# Altium PCB BOARD.PcbDoc
Units mm, origin at the board's own origin, x right, y up, seen from the top; angles counter-clockwise.
Board outline 55 x 55 mm, 2 copper layers (Top Layer, Bottom Layer); 45 components, 73 nets, 188 pads, 24 vias.
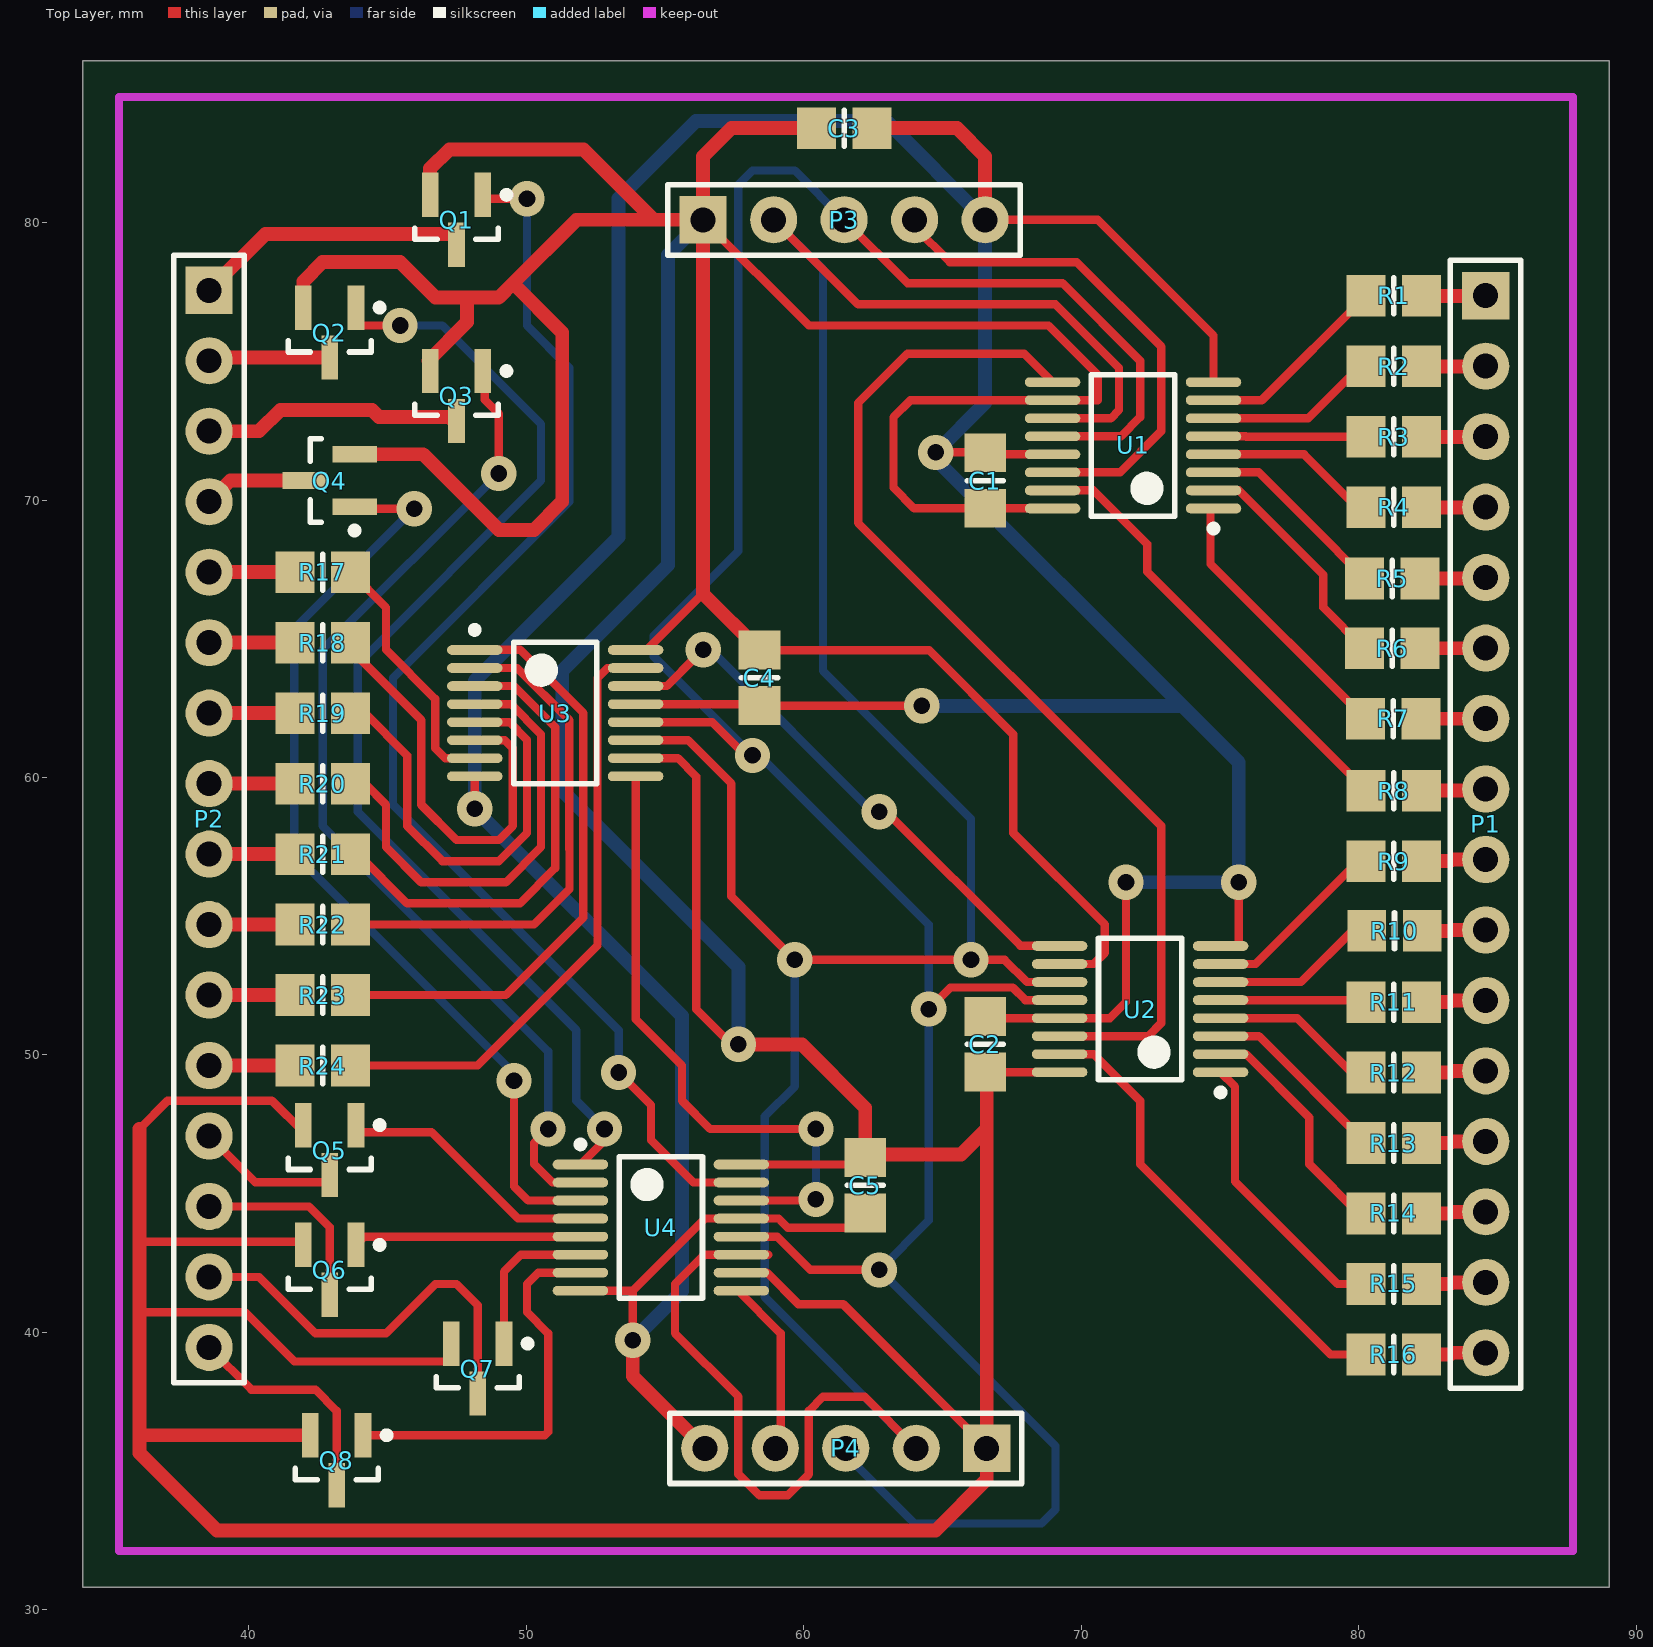
[diagram p0: Top Layer view]
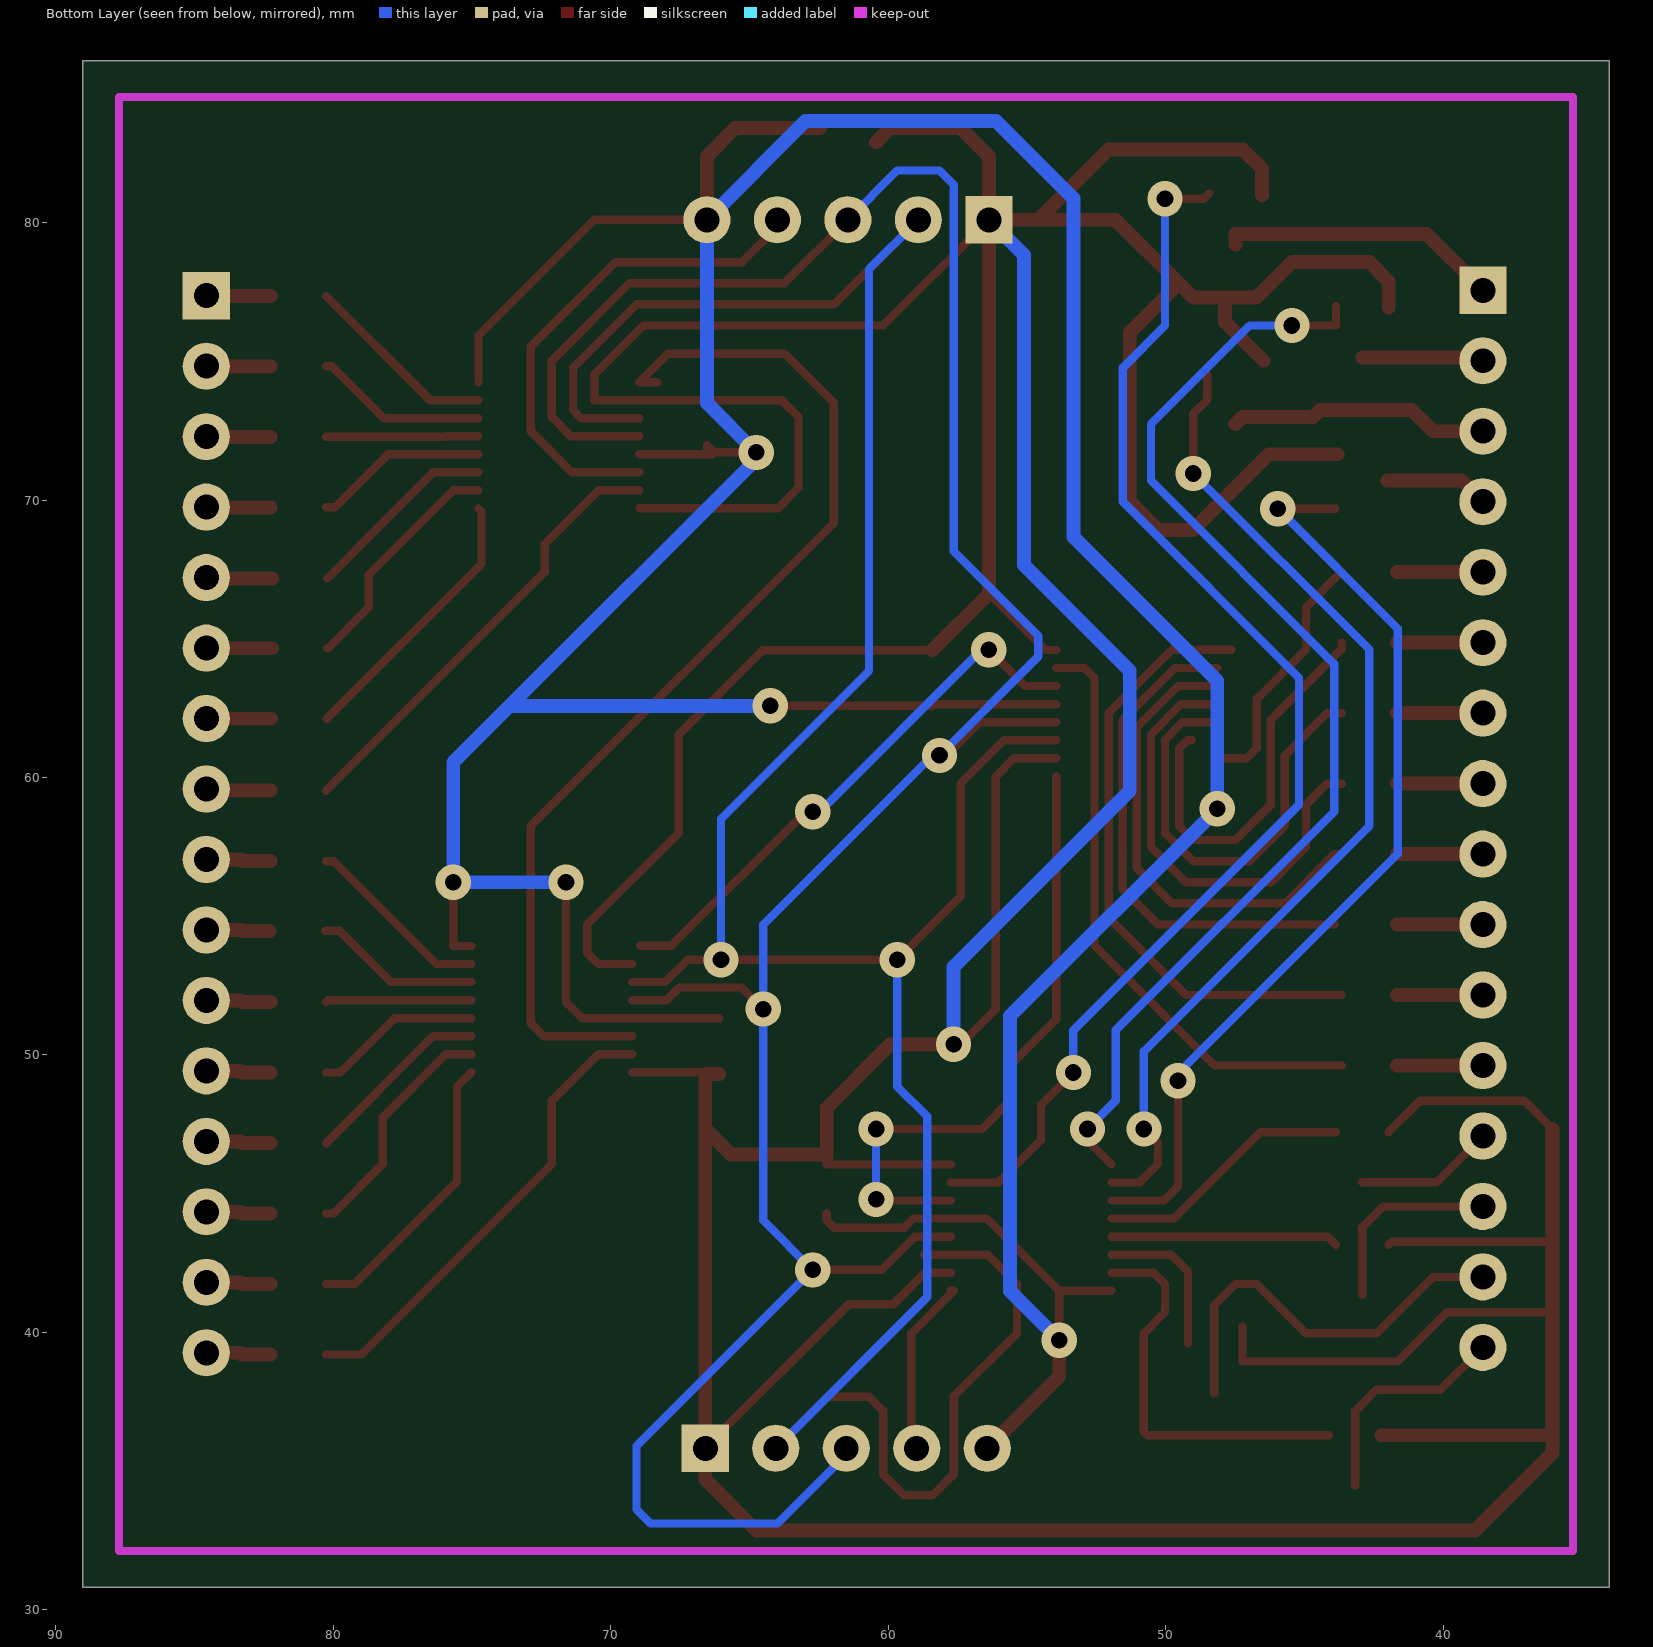
[diagram p1: Bottom Layer view, seen from below]

## Layer stack, top to bottom
Top Solder: solder mask 0.0102, Solder Resist, Dk 3.5
Top Layer: signal copper 0.0356
Dielectric 1: dielectric 0.32, FR-4, Dk 4.8
Bottom Layer: signal copper 0.0356
Bottom Solder: solder mask 0.0102, Solder Resist, Dk 3.5

## Board outline
34.025,30.825 89.025,30.825 89.025,85.825 34.025,85.825

## Design rules (kind name [scope] priority, off if disabled: settings)
Clearance [All] p1: gap=0.2
HoleSize [All] p1 off: absolutevalues=TRUE maxlimit=2.54 minlimit=0.025 maxpercent=80.000 minpercent=20.000
HoleToHoleClearance [All] p1 off: gap=0.254 allowstackedmicrovias=TRUE
LayerPairs [All] p1 off: enforce=TRUE
MinimumSolderMaskSliver [All] p1 off: minsoldermaskwidth=0.254
NetAntennae [All] p1 off: netantennaetolerance=0
PolygonConnect [All] p1: connectstyle=Relief reliefconductorwidth=0.254 reliefentries=4 polygonreliefangle="90 Angle" airgapwidth=0.254
RoutingVias [All] p1: holewidth=0.6 width=1.27 viastyle="Through Hole" minholewidth=0.6 minwidth=1.27 maxholewidth=0.6 maxwidth=1.27
SilkToBoardRegionClearance [All] p1 off:
SilkToSilkClearance [All] p1 off: silktosilkclearance=0.254
SilkToSolderMaskClearance [IsPad] p1 off: minsilkscreentomaskgap=0.254 clearancetoexposedcopper=TRUE
SolderMaskExpansion [All] p1: expansion=0.102
Width [All] p1: maxlimit=2 minlimit=0.2 preferedwidth=0.3
21 further rules are at their usual default settings.

## Components (designator, comment, footprint, x,y, rotation, side; value= is the part's Value field where it differs from the comment)
C1 "Cap" 6-0805_M 66.537,70.703 r270 top
C2 "Cap" 6-0805_M 66.537,50.383 r270 top
C3 "Cap" 6-0805_M 61.457,83.403 r180 top
C4 "Cap" 6-0805_M 58.409,63.591 r90 top
C5 "Cap" 6-0805_M 62.219,45.303 r90 top
P1 "Header 16" HDR1X16 84.58,77.366 r270 top
P2 "Header 16" HDR1X16 38.571,77.561 r270 top
P3 "Heade_ 5_IN" HDR1X5 56.377,80.101 r0 top
P4 "Heade_ 5_OUT" HDR1X5 66.596,35.825 r180 top
Q1 "IRLML6402" SOT95P237X112-3N 47.487,80.101 r270 top
Q2 "IRLML6402" SOT95P237X112-3N 42.915,76.037 r270 top
Q3 "IRLML6402" SOT95P237X112-3N 47.487,73.751 r270 top
Q4 "IRLML6402" SOT95P237X112-3N 42.915,70.703 r180 top
Q5 "IRLML6402" SOT95P237X112-3N 42.915,46.573 r270 top
Q6 "IRLML6402" SOT95P237X112-3N 42.915,42.255 r270 top
Q7 "IRLML6402" SOT95P237X112-3N 48.249,38.699 r270 top
Q8 "IRLML6402" SOT95P237X112-3N 43.169,35.397 r270 top
R1 "Res2" 6-0805_M 81.269,77.358 r0 top
R2 "Res2" 6-0805_M 81.269,74.818 r0 top
R3 "Res2" 6-0805_M 81.269,72.278 r0 top
R4 "Res2" 6-0805_M 81.269,69.738 r0 top
R5 "Res2" 6-0805_M 81.218,67.172 r0 top
R6 "Res2" 6-0805_M 81.218,64.658 r0 top
R7 "Res2" 6-0805_M 81.244,62.118 r0 top
R8 "Res2" 6-0805_M 81.269,59.527 r0 top
R9 "Res2" 6-0805_M 81.269,56.987 r0 top
R10 "Res2" 6-0805_M 81.294,54.472 r0 top
R11 "Res2" 6-0805_M 81.269,51.907 r0 top
R12 "Res2" 6-0805_M 81.269,49.367 r0 top
R13 "Res2" 6-0805_M 81.269,46.827 r0 top
R14 "Res2" 6-0805_M 81.269,44.287 r0 top
R15 "Res2" 6-0805_M 81.269,41.747 r0 top
R16 "Res2" 6-0805_M 81.269,39.207 r0 top
R17 "Res2" 6-0805_M 42.661,67.401 r180 top
R18 "Res2" 6-0805_M 42.661,64.861 r180 top
R19 "Res2" 6-0805_M 42.661,62.321 r180 top
R20 "Res2" 6-0805_M 42.661,59.781 r180 top
R21 "Res2" 6-0805_M 42.661,57.241 r180 top
R22 "Res2" 6-0805_M 42.661,54.701 r180 top
R23 "Res2" 6-0805_M 42.661,52.161 r180 top
R24 "Res2" 6-0805_M 42.661,49.621 r180 top
U1 "74HC595" TSOP65P640X110-16M 71.871,71.973 r180 top
U2 "74HC595" TSOP65P640X110-16M 72.125,51.653 r180 top
U3 "74HC595" TSOP65P640X110-16M 51.043,62.321 r0 top
U4 "74HC595" TSOP65P640X110-16M 54.853,43.779 r0 top

## Footprints (in the part's own frame and the unit in brackets; to place one, negate y for a bottom-side part, rotate by r counter-clockwise, add the part's x,y. Pads: shape width x height; smd on the part's side, far side on the other; paste and mask are expansions set on the pad)
6-0805_M [mm] "Chip Resistor, Body 2.0x1.2mm, IPC Low Density"
  rect 1.4x1.5 smd: 1(-1,0) 2(1,0)
  silkscreen extent 0,-0.65 0,0.65, body extent -1.07,-0.7 1.07,0.7, height 0.7
HDR1X5 [mm] "Connector; Header; 5 Position"
  rect 1.7x1.7 hole 0.9: 1(0,0)
  round 1.7 hole 0.9: 2(2.54,0) 3(5.08,0) 4(7.62,0) 5(10.16,0)
  silkscreen extent -1.27,-1.27 11.43,1.27
HDR1X16 [mm] "Connector; Header; 16 Position"
  rect 1.7x1.7 hole 0.9: 1(0,0)
  round 1.7 hole 0.9: 2(2.54,0) 3(5.08,0) 4(7.62,0) 5(10.16,0) 6(12.7,0) 7(15.24,0) 8(17.78,0) 9(20.32,0) 10(22.86,0) 11(25.4,0) 12(27.94,0) 13(30.48,0) 14(33.02,0) 15(35.56,0) 16(38.1,0)
  silkscreen extent -1.27,-1.27 39.37,1.27
SOT95P237X112-3N [mm] "SOT23, 3-Leads, Body 2.92x2.37mm, Pitch 0.95mm, IPC Medium Density"
  rect 1.6x0.6 smd: 1(-0.9,0.95) 2(0.9,0) 3(-0.9,-0.95)
  silkscreen extent -1.02,-1.5 0.7,1.93, body extent -0.7,-1.52 0.7,1.52, height 1.12
TSOP65P640X110-16M [mm] "TSOP, 16-Leads, Body 5.00x4.40mm, Pitch 0.65mm, IPC Low Density"
  oval 2x0.35 smd: 1(-2.9,2.275) 2(-2.9,1.625) 3(-2.9,0.975) 4(-2.9,0.325) 5(-2.9,-0.325) 6(-2.9,-0.975) 7(-2.9,-1.625) 8(-2.9,-2.275) 9(2.9,-2.275) 10(2.9,-1.625) 11(2.9,-0.975) 12(2.9,-0.325) 13(2.9,0.325) 14(2.9,0.975) 15(2.9,1.625) 16(2.9,2.275)
  silkscreen extent -3.03,-2.55 1.5,3.12, body extent -2.25,-2.55 2.25,2.55, height 1.1

## Part data
C1 C2 C3 C4 C5: "Capacitor"
P1 P2: "Header, 16-Pin"
P3 P4: library part "Header 5", "Header, 5-Pin"
R1 R2 R3 R4 R5 R6 R7 R8 R9 R10 R11 R12 R13 R14 R15 R16 R17 R18 R19 R20 R21 R22 R23 R24: "Resistor"
U1 U2 U3 U4: "NXP"

## Via types
v1: diameter 1.27, hole 0.6, Top Layer to Bottom Layer, 24 vias

## Nets (pads, with @x,y where several pads share a name; then routed paths per layer and width w, separated by ;. In a path a pad name is that pad's centre, name@x,y a point inside that pad or via, vN(x,y) a via of type N, cw(c..) or ccw(c..) an arc to the next point about the centre after c; other vN are vias at no path point)
A1: P2.1 Q1.2 | length 10.3
  Top Layer w0.5: P2.1@38.943,77.653 38.663,77.653 40.603,79.593 47.487,79.593 Q1.2
A2: P2.2 Q2.2 | length 4.7
  Top Layer w0.5: P2.2 38.851,75.021 P2.2@38.967,75.137 ; P2.2@38.687,75.137 P2.2@38.967,75.137 ; Q2.2 P2.2@38.967,75.137
A3: P2.3 Q3.2 | length 9.4
  Top Layer w0.5: P2.3 40.375,72.481 41.137,73.243 44.439,73.243 44.693,72.989 47.233,72.989 Q3.2@47.487,72.735
A4: P2.4 Q4.2 | length 3.8
  Top Layer w0.5: P2.4 39.333,70.703 Q4.2
A5: P2.13 Q5.2 | length 5
  Top Layer w0.3: P2.13 40.233,45.419 Q5.2@42.915,45.419
A6: P2.14 Q6.2 | length 7.1
  Top Layer w0.3: P2.14 42.174,44.541 42.915,43.8 Q6.2
A7: P2.15 Q7.2 | length 14.8
  Top Layer w0.3: P2.15 40.375,42.001 42.407,39.969 44.947,39.969 46.725,41.747 47.487,41.747 48.249,40.985 Q7.2
A8: P2.16 Q8.2 | length 8.2
  Top Layer w0.3: P2.16 40.095,37.937 42.407,37.937 43.169,37.175 Q8.2
BL1: P1.8 R8.2 | length 2.3
  Top Layer w0.5: R8.2 84.521,59.527 P1.8
BL2: P1.7 R7.2 | length 2.3
  Top Layer w0.5: R7.2 84.572,62.118 P1.7
BL3: P1.6 R6.2 | length 2.4
  Top Layer w0.5: R6.2 84.572,64.658 P1.6
BL4: P1.5 R5.2 | length 2.4
  Top Layer w0.5: R5.2 84.546,67.172 P1.5
BL5: P1.4 R4.2 | length 2.3
  Top Layer w0.5: R4.2 84.572,69.738 P1.4
BL6: P1.3 R3.2 | length 2.3
  Top Layer w0.5: R3.2 84.572,72.278 P1.3
BL7: P1.2 R2.2 | length 2.3
  Top Layer w0.5: R2.2 84.572,74.818 P1.2
BL8: P1.1 R1.2 | length 2.3
  Top Layer w0.5: R1.2 84.572,77.358 P1.1
G1: Q8.1 U4.7 | length 14.5
  Top Layer w0.3: Q8.1 50.673,36.297 50.789,36.413 50.789,39.969 50.027,40.731 50.027,41.747 50.434,42.154 U4.7
G2: Q7.1 U4.6 | length 5.6
  Top Layer w0.3: Q7.1 49.199,42.189 49.814,42.804 U4.6
G3: Q6.1 U4.5 | length 8.2
  Top Layer w0.3: Q6.1 44.164,43.454 U4.5
G4: Q5.1 U4.4 | length 9.4
  Top Layer w0.3: Q5.1@43.865,47.219 46.587,47.219 49.702,44.104 U4.4
G5: Q4.1 U4.3 | length 34.2
  Top Layer w0.3: Q4.1@43.881,69.687 v1(45.963,69.687) ; v1(49.56,49.072) 49.56,45.262 50.068,44.754 U4.3
  Bottom Layer w0.3: v1(45.963,69.687) 41.645,65.369 41.645,57.241 49.56,49.326 v1(49.56,49.072)
G6: Q3.1 U4.2 | length 36.8
  Top Layer w0.3: Q3.1@48.503,74.513 48.503,73.619 49.011,73.111 v1(49.011,70.957) ; v1(50.789,47.335) 50.281,46.827 50.281,46.065 50.942,45.404 U4.2
  Bottom Layer w0.3: v1(49.011,70.957) 42.661,64.607 42.661,58.257 50.789,50.129 v1(50.789,47.335)
G7: Q2.1 U4.1 | length 42.3
  Top Layer w0.3: Q2.1@43.865,76.987 43.865,76.291 v1(45.455,76.291) ; U4.1 52.821,46.922 v1(52.821,47.335)
  Bottom Layer w0.3: v1(45.455,76.291) 46.979,76.291 50.535,72.735 50.535,70.703 43.931,64.099 43.931,58.765 51.805,50.891 51.805,48.351 v1(52.821,47.335)
G8: Q1.1 U4.15 | length 46.6
  Top Layer w0.3: Q1.1@48.437,81.051 48.625,80.863 v1(50.027,80.863) ; v1(53.329,49.367) 54.498,48.198 54.498,46.928 56.022,45.404 U4.15
  Bottom Layer w0.3: v1(50.027,80.863) 50.027,76.291 51.551,74.767 51.551,69.941 45.201,63.591 45.201,59.019 53.329,50.891 v1(53.329,49.367)
GND: C1.1 C2.1 C3.1 C4.1 C5.1 P3.5 P4.5 U1.8 U1.13 U2.8 U2.13 U3.8 U3.13 U4.8 U4.13 | length 171.3
  Top Layer w0.3: v1(48.143,58.871) U3.8 ; U4.8 53.837,41.504 ; v1@53.742,39.715 v1(53.837,39.715) 53.837,41.504 ; U3.13 C4.1@58.354,62.646 ; C4.1 64.235,62.591 v1@64.251,62.575 ; 59.1,44.104 U4.13 56.448,44.104 53.848,41.504 53.837,41.504 ; 59.171,44.033 59.425,43.779 61.965,43.779 62.219,44.033 C5.1 ; v1(64.759,71.719) 66.283,71.719 66.537,71.973 C1.1 ; C2.1@66.084,51.328 U2.13 71.038,51.328 71.617,51.907 v1@71.617,55.971 ; C1.1@66.338,71.648 U1.13 ; P3.5 70.601,80.101 74.771,75.931 U1.8 ; U2.8 75.67,53.928 75.681,53.939 v1(75.681,56.225)
  Top Layer w0.5: v1@54.091,39.461 53.837,39.207 53.837,38.424 P4.5 ; C3.1 65.521,83.403 66.537,82.387 P3.5
  Bottom Layer w0.5: v1(53.837,39.715) 55.615,41.493 55.615,51.399 v1(48.143,58.871) 48.143,63.485 53.329,68.671 53.329,80.863 56.123,83.657 62.981,83.657 P3.5 ; v1@64.251,62.575 73.649,62.575 ; P3.5@66.537,79.847 66.537,73.497 v1(64.759,71.719) 64.759,71.465 73.649,62.575 ; v1@71.617,55.971 71.871,56.225 v1(75.681,56.225) 75.681,60.543 73.649,62.575
  other v1: 71.617,56.225 64.251,62.591
GR1: P2.12 R24.2 | length 3.1
  Top Layer w0.5: P2.12 R24.2
GR2: P2.11 R23.2 | length 3.1
  Top Layer w0.5: P2.11 R23.2
GR3: P2.10 R22.2 | length 3.1
  Top Layer w0.5: P2.10 R22.2
GR4: P2.9 R21.2 | length 3.1
  Top Layer w0.5: P2.9 R21.2
GR5: P2.8 R20.2 | length 3.1
  Top Layer w0.5: P2.8 R20.2
GR6: P2.7 R19.2 | length 3.1
  Top Layer w0.5: P2.7 R19.2
GR7: P2.6 R18.2 | length 3.1
  Top Layer w0.5: P2.6 R18.2
GR8: P2.5 R17.2 | length 3.1
  Top Layer w0.5: P2.5 R17.2
LT: P3.3 P4.3 U1.12 U2.12 U3.12 U4.12 | length 104.5
  Top Layer w0.3: U3.12 56.702,61.996 v1@58.155,60.543 ; U4.12 59.043,43.454 60.242,42.255 v1(62.727,42.255) ; v1(58.155,60.797) v1@58.155,61.051 ; P3.3 63.743,77.815 69.331,77.815 72.125,75.021 72.125,72.989 71.434,72.298 U1.12 ; v1(64.505,51.653) 65.285,52.433 67.535,52.433 67.99,51.978 U2.12
  Bottom Layer w0.3: P4.3@61.203,35.512 61.596,35.512 63.997,33.111 68.569,33.111 69.077,33.619 69.077,35.905 v1(62.727,42.255) 64.505,44.033 v1(64.505,51.653) 64.505,54.701 58.409,60.797 v1(58.155,60.797) 54.599,64.353 54.599,65.115 57.647,68.163 57.647,81.371 58.155,81.879 59.679,81.879 P3.3
MOSI: P3.4 U1.14 | length 18.5
  Top Layer w0.3: P3.4 63.997,79.847 65.267,78.577 69.839,78.577 72.887,75.529 72.887,72.481 71.404,70.998 U1.14
NetR1_1: R1.1 U1.7 | length 7.1
  Top Layer w0.3: U1.7 76.509,73.598 R1.1
NetR2_1: R2.1 U1.6 | length 6.3
  Top Layer w0.3: U1.6 78.18,72.948 80.05,74.818 R2.1
NetR3_1: R3.1 U1.5 | length 5.5
  Top Layer w0.3: U1.5 75.935,72.298 75.955,72.278 R3.1
NetR4_1: R4.1 U1.4 | length 6.3
  Top Layer w0.3: U1.4 78.038,71.648 79.948,69.738 R4.1
NetR5_1: R5.1 U1.3 | length 7
  Top Layer w0.3: U1.3 76.402,70.998 79.237,68.163 79.237,68.154 R5.1
NetR6_1: R6.1 U1.2 | length 8.5
  Top Layer w0.3: U1.2 75.688,70.348 78.729,67.307 78.729,66.131 80.202,64.658 R6.1
NetR7_1: R7.1 U1.1 | length 9.9
  Top Layer w0.3: U1.1 74.665,69.592 74.665,67.696 R7.1
NetR8_1: R8.1 U1.15 | length 16.4
  Top Layer w0.3: U1.15 70.448,70.348 72.379,68.417 72.379,67.417 R8.1
NetR9_1: R9.1 U2.7 | length 6.8
  Top Layer w0.3: U2.7 76.29,53.278 79.999,56.987 R9.1
NetR10_1: R10.1 U2.6 | length 6
  Top Layer w0.3: U2.6 77.926,52.628 79.77,54.472 R10.1
NetR11_1: R11.1 U2.5 | length 5.3
  Top Layer w0.3: U2.5 80.182,51.978 80.253,51.907 R11.1
NetR12_1: R12.1 U2.4 | length 6.1
  Top Layer w0.3: U2.4 77.784,51.328 79.745,49.367 R12.1
NetR13_1: R13.1 U2.3 | length 6.8
  Top Layer w0.3: U2.3 76.402,50.678 80.261,46.819 R13.1
NetR14_1: R14.1 U2.2 | length 8.6
  Top Layer w0.3: U2.2 75.942,50.028 78.221,47.749 78.221,46.065 79.999,44.287 R14.1
NetR15_1: R15.1 U2.1 | length 10.4
  Top Layer w0.3: U2.1 75.544,48.859 75.544,45.44 79.237,41.747 R15.1
NetR16_1: R16.1 U2.15 | length 16.9
  Top Layer w0.3: U2.15 70.448,50.028 72.125,48.351 72.125,46.065 78.983,39.207 R16.1
NetR17_1: R17.1 U3.7 | length 9.2
  Top Layer w0.3: R17.1 43.677,67.401 44.947,66.131 44.947,64.607 46.717,62.837 46.717,61.059 47.08,60.696 U3.7
NetR18_1: R18.1 U3.6 | length 14.3
  Top Layer w0.3: R18.1 43.661,64.623 46.217,62.067 46.217,59.019 47.487,57.749 49.011,57.749 49.519,58.257 49.519,61.051 49.224,61.346 U3.6@49.06,61.346
NetR19_1: R19.1 U3.5 | length 16
  Top Layer w0.3: R19.1 44.185,62.321 45.711,60.795 45.711,58.255 46.979,56.987 49.011,56.987 50.027,58.003 50.027,61.36 49.391,61.996 U3.5
NetR20_1: R20.1 U3.4 | length 16.7
  Top Layer w0.3: R20.1 44.185,59.781 44.947,59.019 44.947,57.495 46.217,56.225 49.265,56.225 50.535,57.495 50.535,61.559 49.448,62.646 U3.4
NetR21_1: R21.1 U3.3 | length 17.2
  Top Layer w0.3: R21.1 43.931,57.241 45.709,55.463 49.773,55.463 51.043,56.733 51.043,61.813 49.56,63.296 U3.3
NetR22_1: R22.1 U3.2 | length 18.4
  Top Layer w0.3: R22.1@43.931,54.701 50.281,54.701 51.559,55.979 51.559,57.414 51.551,57.422 51.551,62.067 49.672,63.946 U3.2
NetR23_1: R23.1 U3.1 | length 22.3
  Top Layer w0.3: R23.1@43.672,52.172 43.683,52.161 49.265,52.161 52.059,54.955 52.059,62.321 49.773,64.607 U3.1@47.635,64.607
NetR24_1: R24.1 U3.15 | length 21.9
  Top Layer w0.3: R24.1 48.249,49.621 52.567,53.939 52.567,63.591 52.922,63.946 U3.15
NetU1_9: U1.9 U2.14 | length 39.5
  Top Layer w0.3: U1.9@68.326,74.248 U1.9 67.944,75.275 63.743,75.275 61.965,73.497 61.965,69.179 72.887,58.257 72.887,51.145 72.42,50.678 U2.14
NetU2_9: U2.9 U3.14 | length 19.7
  Top Layer w0.3: U3.14 55.066,63.296 56.123,64.353 v1@56.377,64.353 ; v1(62.727,58.765) 62.981,58.765 67.807,53.939 U2.9@68.94,53.939
  Bottom Layer w0.3: v1@56.25,64.48 56.758,64.48 v1@62.473,58.765
  other v1: 56.377,64.607
NetU3_9: U3.9 U4.14 | length 22.6
  Top Layer w0.3: U3.9 53.943,51.293 55.615,49.621 55.615,48.351 56.631,47.335 v1(60.441,47.335) ; U4.14 v1@60.441,44.754
  Bottom Layer w0.3: v1@60.441,45.049 v1(60.441,47.335)
  other v1: 60.441,44.795
Q7S: P4.4 U4.9 | length 6.8
  Top Layer w0.3: U4.9 57.636,41.504 59.171,39.969 59.171,36.253 58.743,35.825 P4.4
RD1: P1.16 R16.2 | length 2.3
  Top Layer w0.5: R16.2 83.301,39.207 83.36,39.266 P1.16
RD2: P1.15 R15.2 | length 2.3
  Top Layer w0.5: R15.2 83.301,41.747 83.36,41.806 P1.15
RD3: P1.14 R14.2 | length 2.3
  Top Layer w0.5: R14.2 83.301,44.287 83.36,44.346 P1.14
RD4: P1.13 R13.2 | length 2.3
  Top Layer w0.5: R13.2 83.301,46.827 83.36,46.886 P1.13
RD5: P1.12 R12.2 | length 2.3
  Top Layer w0.5: R12.2 83.301,49.367 83.36,49.426 P1.12
RD6: P1.11 R11.2 | length 2.3
  Top Layer w0.5: R11.2 83.301,51.907 83.36,51.966 P1.11
RD7: P1.10 R10.2 | length 2.3
  Top Layer w0.5: R10.2 83.301,54.472 83.335,54.506 P1.10
RD8: P1.9 R9.2 | length 2.3
  Top Layer w0.5: R9.2 83.301,56.987 83.36,57.046 P1.9
SS: P3.2 P4.2 U1.11 U2.11 U3.11 U4.11 | length 117.7
  Top Layer w0.3: U3.11 55.828,61.346 57.393,59.781 57.393,55.717 v1(59.679,53.431) v1(66.029,53.431) ; U4.11@58.728,42.804 U4.11 56.418,42.804 55.361,41.747 55.361,39.969 57.647,37.683 57.647,34.889 58.409,34.127 59.425,34.127 60.187,34.889 60.187,37.175 60.695,37.683 62.198,37.683 P4.2 ; P3.2 61.965,77.053 69.077,77.053 71.363,74.767 71.363,73.243 71.068,72.948 U1.11 ; v1@60.187,53.431 v1(66.029,53.431) ; U2.11 68.047,52.628 67.244,53.431 v1(66.029,53.431)
  Bottom Layer w0.3: P3.2 60.695,78.323 60.695,63.845 66.029,58.511 v1(66.029,53.431) ; v1(59.679,53.431) 59.679,48.869 58.594,47.784 58.594,41.287 P4.2
VCC: C1.2 C2.2 C3.2 C4.2 C5.2 P3.1 P4.1 Q1.3 Q2.3 Q3.3 Q4.3 Q5.3 Q6.3 Q7.3 Q8.3 U1.10 U1.16 U2.10 U2.16 U3.10 U3.16 U4.10 U4.16 | length 299.8
  Top Layer w0.3: 36.057,36.181 36.173,36.297 ; 36.057,40.731 39.867,40.731 41.645,38.953 47.233,38.953 Q7.3@47.233,40.205 ; 36.057,43.271 41.849,43.271 Q6.3 ; 36.057,47.335 37.073,48.351 40.833,48.351 Q5.3@41.965,47.219 ; 47.233,32.857 47.299,32.923 ; U3.10 55.462,60.696 56.123,60.035 56.123,51.653 57.393,50.383 v1(57.647,50.383) ; U3.16 54.334,64.596 56.377,66.639 ; P3.1 60.187,76.291 68.823,76.291 70.601,74.513 70.601,73.598 U1.10 63.844,73.598 63.235,72.989 63.235,70.449 63.981,69.703 C1.2 ; U4.10 58.67,42.154 59.808,41.016 61.426,41.016 P4.1@66.596,35.846 ; U4.16 C5.2@62.219,46.054 ; C4.2 64.521,64.591 67.553,61.559 67.553,58.003 70.855,54.701 70.855,53.685 70.448,53.278 U2.10 ; C5.2 62.332,46.416 C5.2@62.219,46.53 ; C2.2@66.034,49.378 U2.16 ; C1.2@66.791,69.703 U1.16@68.966,69.703
  Top Layer w0.5: 36.057,47.335 36.057,43.271 36.057,40.731 36.057,36.181 36.057,35.651 38.851,32.857 47.233,32.857 64.759,32.857 66.596,34.694 P4.1 P4.1@66.596,35.846 ; 36.173,36.297 Q8.3 ; Q2.3 41.965,77.881 42.661,78.577 45.455,78.577 46.725,77.307 47.868,77.307 ; Q4.3 46.283,71.653 49.011,68.925 50.281,68.925 51.297,69.941 51.297,76.037 49.519,77.815 ; Q3.3@46.471,75.021 47.868,76.418 47.868,77.307 ; Q1.3 46.537,81.945 47.233,82.641 52.059,82.641 54.599,80.101 ; 56.377,66.623 C4.2 ; 56.377,66.639 P3.1 ; v1(57.647,50.383) 59.933,50.383 62.219,48.097 C5.2 ; C3.2@60.441,82.895 59.933,83.403 57.393,83.403 56.377,82.387 P3.1 ; C5.2@62.332,46.416 65.677,46.416 66.596,47.335 ; C2.2@66.093,49.319 66.596,49.319 66.596,47.335 ; P4.1@66.596,35.905 66.596,47.335 ; 47.868,77.307 49.011,77.307 49.519,77.815 ; 49.519,77.815 51.805,80.101 54.599,80.101 ; 54.599,80.101 P3.1
  Bottom Layer w0.5: P3.1 55.107,78.831 55.107,67.655 51.297,63.845 51.297,59.527 57.647,53.177 v1(57.647,50.383)

## Keep-outs
Keep-Out Layer:
  lines w0.3: 35.325,32.125 35.325,84.525 87.725,84.525 87.725,32.125 35.325,32.125